# Altium PCB Multiple Buck Converter.PcbDoc
Units mm, origin at the board's own origin, x right, y up, seen from the top; angles counter-clockwise.
Board outline 87.76 x 86.11 mm, 2 copper layers (Top Layer, Bottom Layer); 46 components, 21 nets, 108 pads, 528 vias.
Unrouted connection lines stored in the file: 14.
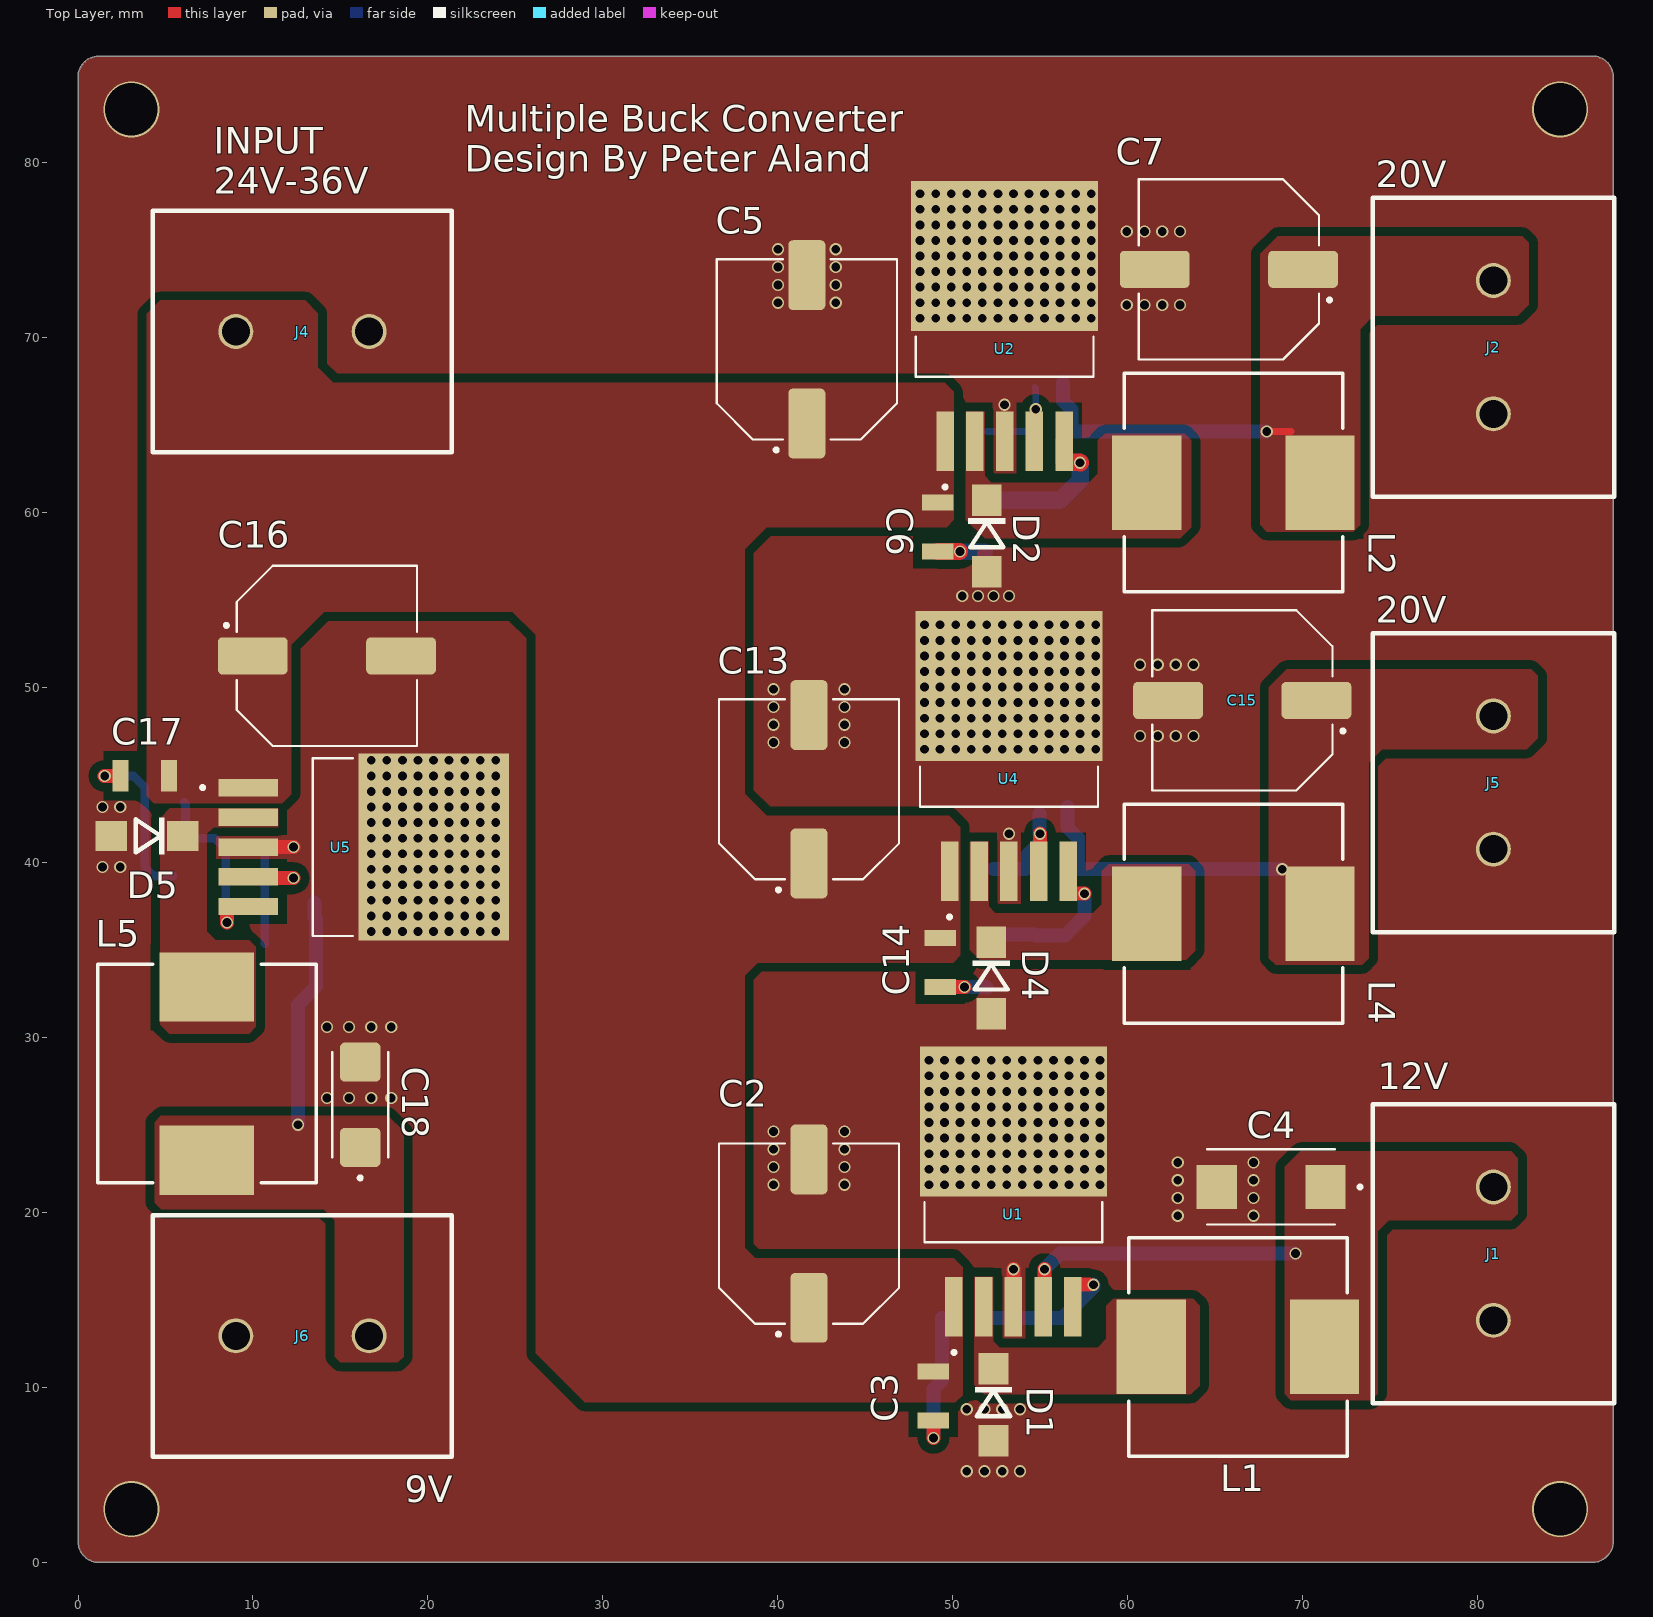
[diagram p0: Top Layer view]
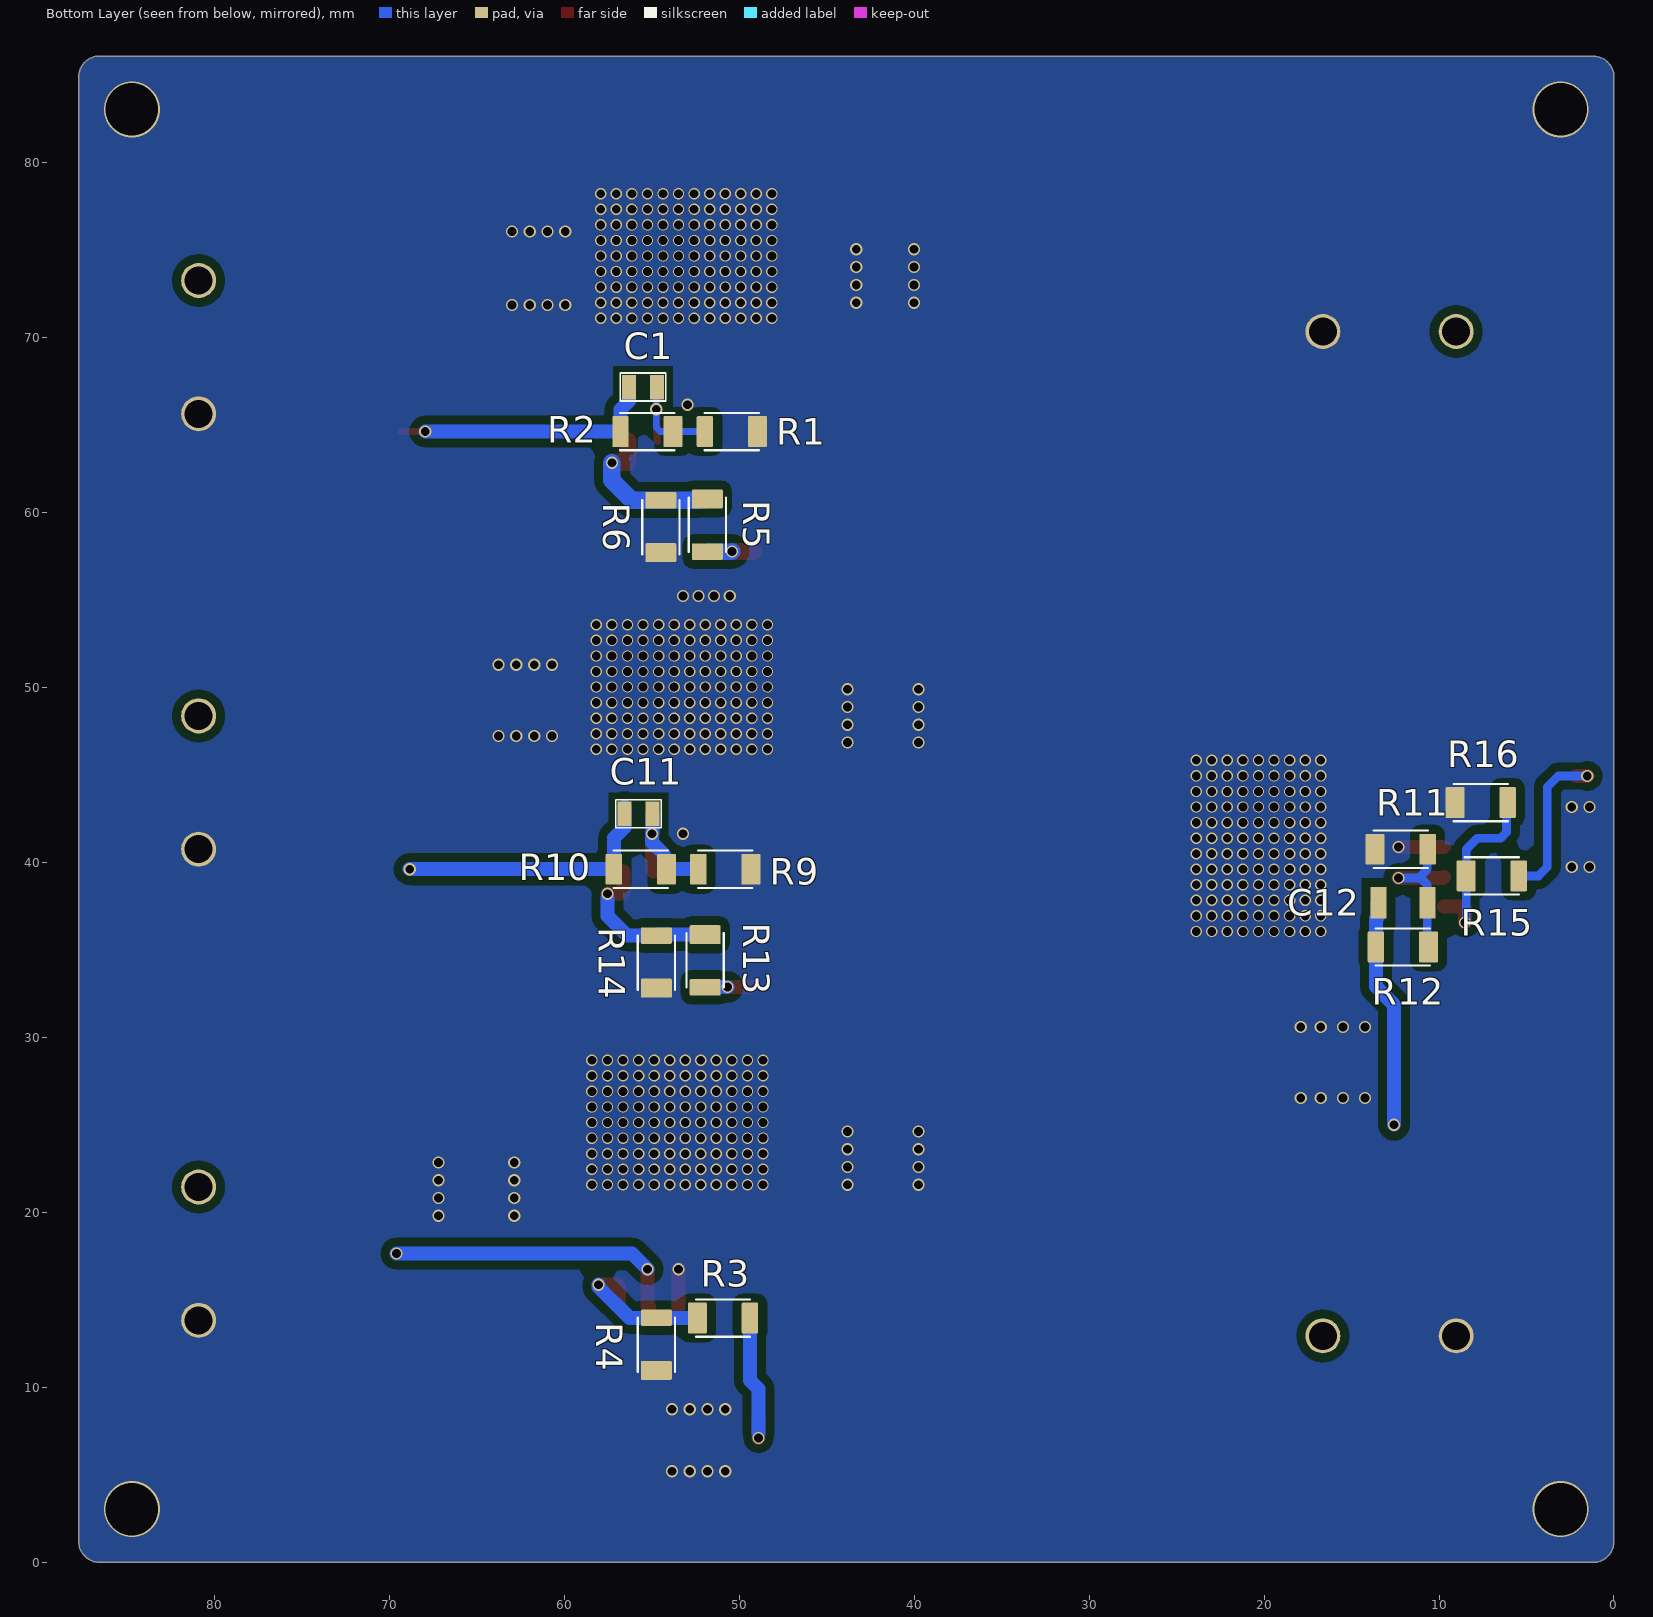
[diagram p1: Bottom Layer view, seen from below]
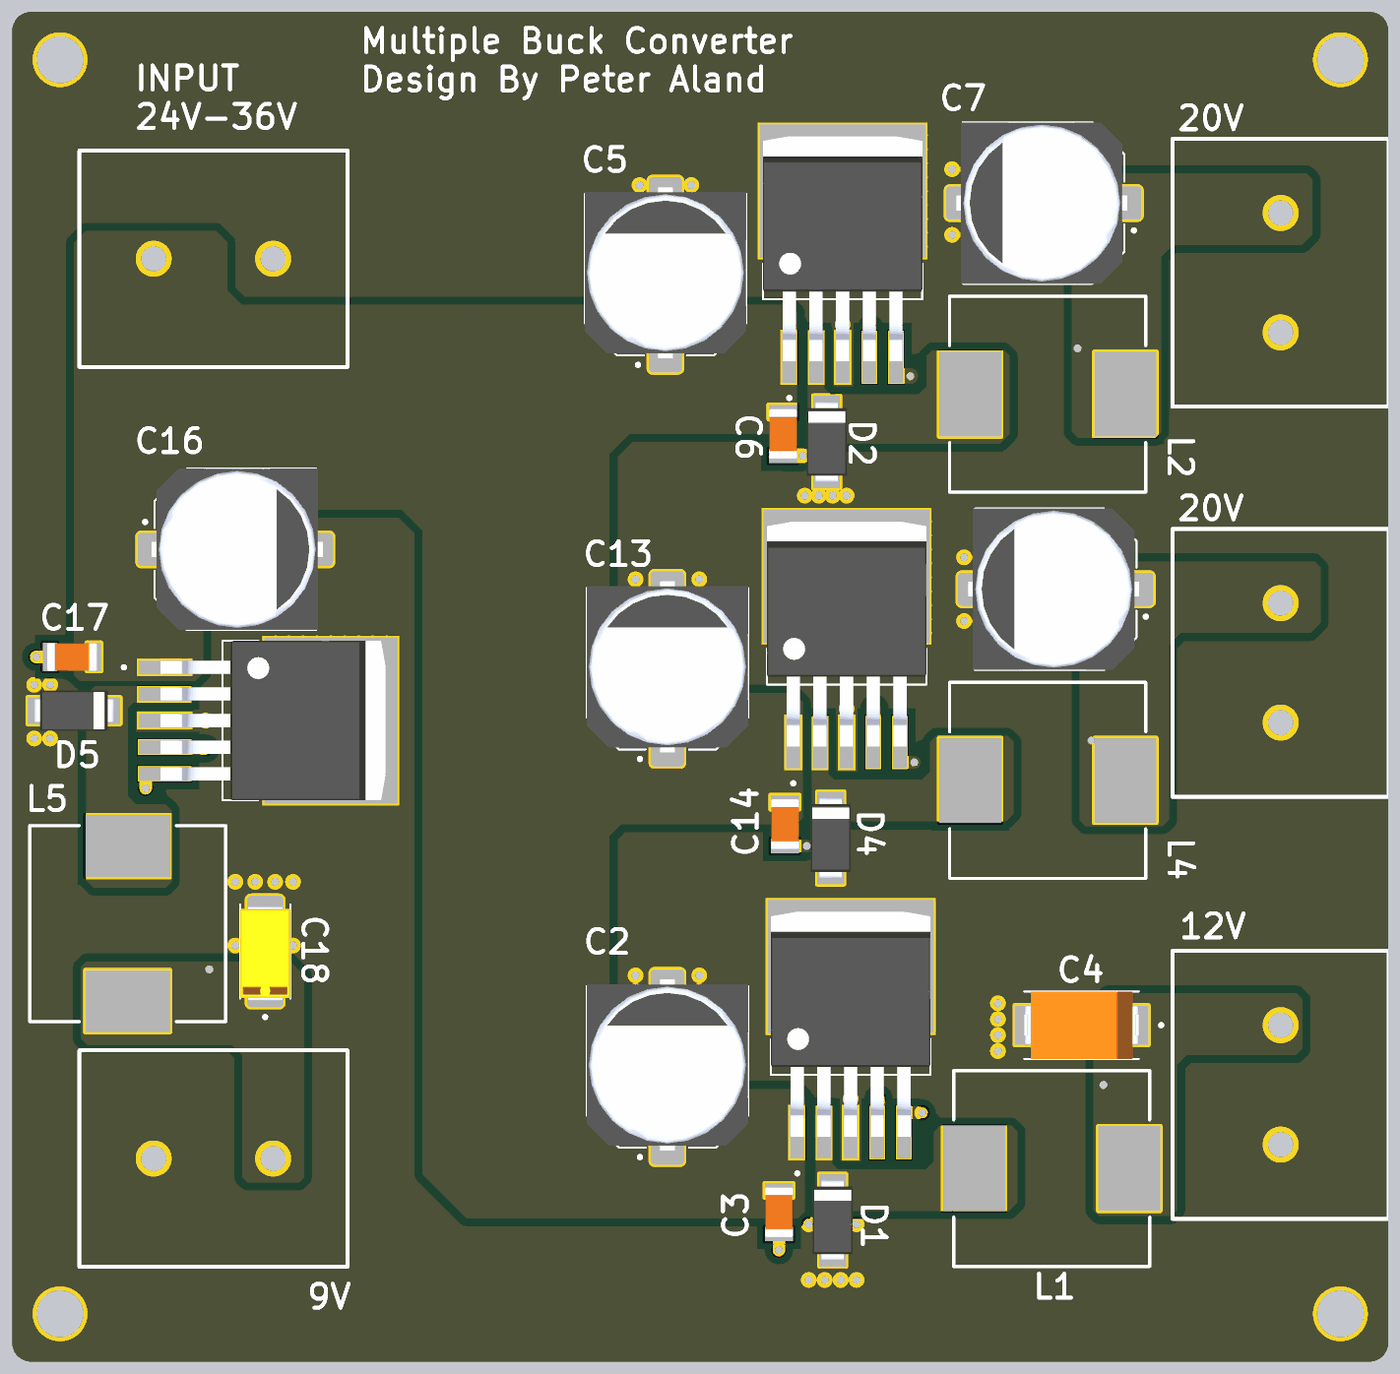
[diagram p2: 3D render of the assembled board from above, using the file's embedded part models]
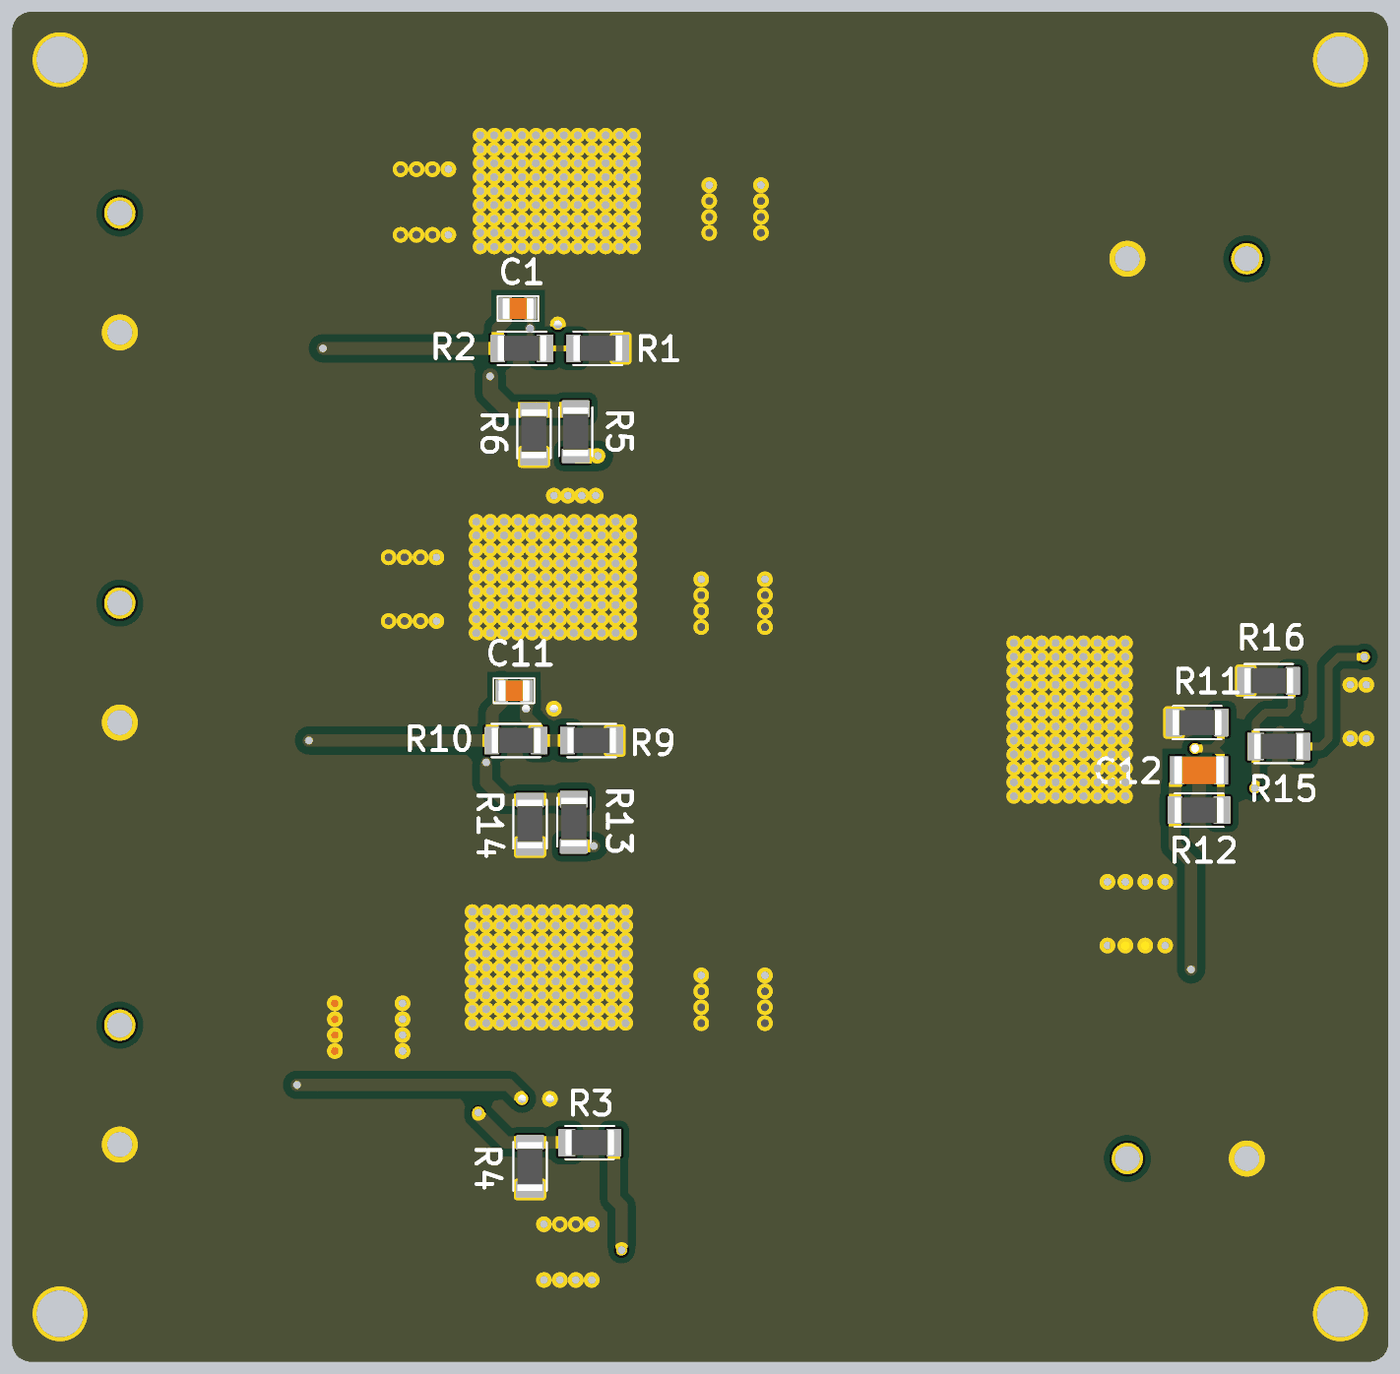
[diagram p3: 3D render of the assembled board from below, using the file's embedded part models]

## Layer stack, top to bottom
Top Solder: solder mask 0.0102, Solder Resist, Dk 3.5
Top Layer: signal copper 0.0356
Dielectric 1: dielectric 0.32, FR-4, Dk 4.8
Bottom Layer: signal copper 0.0356
Bottom Solder: solder mask 0.0102, Solder Resist, Dk 3.5

## Board outline
0,1.143 0,84.836 cw(c1.206,84.899) 1.143,86.106 86.487,86.106 cw(c86.55,84.9) 87.757,84.963 87.757,1.27 cw(c86.55,1.206) 86.614,0 1.27,0 cw(c1.207,1.206)

## Design rules (kind name [scope] priority, off if disabled: settings)
Clearance "Ground Polygon Layer 1" [InNamedPolygon('GND_L01_P021')] p1: gap=0.5 ignorepadtopadclearanceinfootprint=FALSE
Clearance "Ground Polygon Layer 2" [InNamedPolygon('GND_L02_P020')] p2: gap=0.5 ignorepadtopadclearanceinfootprint=FALSE
Clearance [All] p3: gap=0.152 ignorepadtopadclearanceinfootprint=FALSE
HoleSize [All] p1: absolutevalues=TRUE maxlimit=2.54 minlimit=0.4 maxpercent=80.000 minpercent=20.000
MinimumAnnularRing [All] p1: minimumring=0.01
PolygonConnect [All] p1: connectstyle=Direct reliefconductorwidth=0.254 reliefentries=4 polygonreliefangle="90 Angle" airgapwidth=0.254
RoomDefinition [False vs False] p1: confinementstyle=ConfineIn formatcopy=TRUE lockcomponents=FALSE outline -0.127,1.136 ccw(c1.207,1.206) 1.277,-0.127 ccw(c1.27,0) 1.397,0 ccw(c1.27,0) 1.263,0.127 cw(c1.207,1.206) 0.127,1.15 ccw(c0,1.143)
RoutingVias [All] p1: holewidth=0.4 width=0.6 viastyle="Through Hole" minholewidth=0.4 minwidth=0.4 maxholewidth=6.3 maxwidth=6.3
SolderMaskExpansion [All] p1: expansion=0.15 istentingtop=FALSE
Width [All] p1: maxlimit=12.7 minlimit=0.15 preferedwidth=0.203
29 further rules are at their usual default settings.

## Components (designator, comment, footprint, x,y, rotation, side; value= is the part's Value field where it differs from the comment)
C1 "560pF" C0805 55.499,67.183 r180 bottom
C2 "220uF" CAPAE1030X1080N 41.783,18.796 r90 top
C3 "100nF" CAP_1206 48.895,9.525 r270 top
C4 "100uF" CAPPM7343X310N 68.199,21.463 r180 top
C5 "220uF" CAPAE1030X1080N 41.656,69.342 r90 top
C6 "100nF" CAP_1206 49.149,59.182 r270 top
C7 "220uF" CAPAE1030X1080N 65.786,73.914 r180 top
C11 "560pF" C0805 55.753,42.799 r180 bottom
C12 "1nF" CAP_1206 12.065,37.719 r180 bottom
C13 "220uF" CAPAE1030X1080N 41.783,44.196 r90 top
C14 "100nF" CAP_1206 49.276,34.29 r270 top
C15 "220uF" CAPAE1030X1080N 66.548,49.276 r180 top
C16 "220uF" CAPAE1030X1080N 14.224,51.816 r0 top
C17 "100nF" CAP_1206 3.81,44.958 r180 top
C18 "100uF" CAPPM6032X280N 16.129,26.162 r90 top
D1 "SS34" SS34-1 52.324,9.017 r270 top
D2 "SS34" SS34-1 51.943,58.674 r270 top
D4 "SS34" SS34-1 52.197,33.401 r270 top
D5 "SS34" SS34-1 3.937,41.529 r180 top
J1 "PCB Terminal Block 7.62" KF25C-7.62-2P 80.899,17.653 r90 top
J2 "PCB Terminal Block 7.62" KF25C-7.62-2P 80.899,69.469 r90 top
J4 "PCB Terminal Block 7.62" KF25C-7.62-2P 12.827,70.358 r0 top
J5 "PCB Terminal Block 7.62" KF25C-7.62-2P 80.899,44.577 r90 top
J6 "PCB Terminal Block 7.62" KF25C-7.62-2P 12.827,12.954 r0 top
L1 "100uH" DS1207 66.294,12.319 r0 top
L2 "100uH" DS1207 66.04,61.722 r0 top
L4 "100uH" DS1207 66.04,37.084 r0 top
L5 "150uH" DS1207 7.366,27.94 r270 top
R1 "1k" RES_1206 50.419,64.643 r0 bottom
R2 "15k" RES_1206 55.245,64.643 r0 bottom
R3 "47k" RES_1206 50.927,13.97 r180 bottom
R4 "47k" RES_1206 54.737,12.446 r90 bottom
R5 "47k" RES_1206 51.824,59.321 r270 bottom
R6 "47k" RES_1206 54.483,59.182 r90 bottom
R9 "1k" RES_1206 50.8,39.624 r0 bottom
R10 "15k" RES_1206 55.626,39.624 r0 bottom
R11 "1k" RES_1206 12.192,40.767 r180 bottom
R12 "6.8k" RES_1206 12.065,35.179 r0 bottom
R13 "47k" RES_1206 51.943,34.417 r270 bottom
R14 "47k" RES_1206 54.737,34.29 r90 bottom
R15 "47k" RES_1206 6.985,39.243 r180 bottom
R16 "47k" RES_1206 7.62,43.434 r180 bottom
U1 "LM2596SX-ADJ/NOPB" VREG_LM2596SX-ADJ/NOPB 53.467,25.205 r90 top
U2 "LM2596SX-ADJ/NOPB" VREG_LM2596SX-ADJ/NOPB 52.959,74.676 r90 top
U4 "LM2596SX-ADJ/NOPB" VREG_LM2596SX-ADJ/NOPB 53.213,50.097 r90 top
U5 "LM2596SX-ADJ/NOPB" VREG_LM2596SX-ADJ/NOPB 20.32,40.894 r0 top

## Footprints (in the part's own frame and the unit in brackets; to place one, negate y for a bottom-side part, rotate by r counter-clockwise, add the part's x,y. Pads: shape width x height; smd on the part's side, far side on the other; paste and mask are expansions set on the pad)
C0805 [mm]
  rect 0.8x1.4 smd: 1(-0.8,0) 2(0.8,0)
  silkscreen extent -1.3,-0.8 1.3,0.8, body extent -1,-0.67 1,0.68, height 1.3
CAP_1206 [mil]
  rect 36x71 smd: 1(-55,0) 2(55,0)
  body extent -63,-35 63,36, height 62
CAPAE1030X1080N [mm]
  rrect25% 3.99x2.12 smd: 1(-4.24,0) 2(4.24,0)
  silkscreen extent -5.85,-5.15 5.15,5.15, body extent -5.32,-5.15 5.58,5.15, height 10.8
CAPPM6032X280N [mm]
  rrect25% 2.24x2.32 smd: 1(-2.435,0) 2(2.435,0)
  silkscreen extent -4.28,-1.6 3,1.6, body extent -3.13,-1.6 2.87,1.6, height 2.8
CAPPM7343X310N [mm]
  rect 2.3x2.52 smd: 1(-3.11,0) 2(3.11,0)
  silkscreen extent -5.18,-2.15 3.65,2.15, body extent -3.65,-2.15 3.65,2.15, height 3.1
DS1207 [mm] "Precision Wire Wound Inductor, 2-Leads, Body 12,25x12,25mm, IPC Medium Density"
  rect 3.95x5.4 smd: 1(-4.95,0) 2(4.95,0)
  silkscreen extent -6.25,-6.25 6.25,6.25, body extent -6.25,-6.25 6.25,6.25, height 8
KF25C-7.62-2P [mm] "24A -40?~+105? 250V Black Midfoot Double - Walled(Double) 12~22 Straight pin 2 1 7.62mm 2.5 Straight,P=7.62mm Barrier Terminal Blocks ROHS"
  round 2 hole 1.6: 1(-3.81,0) 2(3.81,0)
  silkscreen extent -8.54,-6.9 8.54,6.9
RES_1206 [mm]
  rrect14% 1.09x1.77 smd: 1(-1.465,0)
  rrect14% 0.94x1.77 smd: 2(1.54,0)
  silkscreen extent -1.55,-1.06 1.55,1.06, body extent -1.55,-0.8 1.55,0.8, height 0.65
SS34-1 [mm]
  rect 1.8x1.7 smd: A(2.05,0) C(-2.05,0)
  silkscreen extent -1,-1.05 0.65,1.05, body extent -2.57,-1.28 2.57,1.28, height 2.62
VREG_LM2596SX-ADJ/NOPB [mm]
  rect 3.4x1 smd paste-3 mask+0: 1(-10.6,3.4) 2(-10.6,1.7) 3(-10.6,0) 4(-10.6,-1.7) 5(-10.6,-3.4)
  rect 8.6x10.7 smd paste-6 mask+0: 3(0,0)
  silkscreen extent -13.3,-5.08 -4.62,5.08, body extent -10.86,-5.08 3.49,5.08, height 4.65

## Part data
C1 C11: library part CC0805GRNPO0BN561, "100V 560pF NP0 ±2% 0805 Multilayer Ceramic Capacitors MLCC - SMD/SMT ROHS", Manufacturer=YAGEO, Package=0805, ComponentLink1Description=LCSC, ComponentLink1URL=https://www.lcsc.com/product-detail/Multilayer-Ceramic-Capacitors-MLCC-SMD-SMT_YAGEO-CC0805GRNPO0BN561_C527197.html, Manufacturer Part Number=CC0805GRNPO0BN561
C2 C5 C7 C13 C15 C16: library part UUD1H221MNL1GS, "-45℃~+105℃ 5000hrs@105℃ 220uF 10mm 50V 10mm ±20% SMD,D10xL10mm Aluminum Electrolytic Capacitors - SMD ROHS", Manufacturer=Nichicon, Package=SMD,D10xL10mm, ComponentLink1Description=LCSC, ComponentLink1URL=https://www.lcsc.com/product-detail/Aluminum-Electrolytic-Capacitors-SMD_Nichicon-UUD1H221MNL1GS_C125976.html, Manufacturer Part Number=UUD1H221MNL1GS
C3 C6 C14 C17: library part CC1206KRX7R9BB104, "50V 100nF X7R ±10% 1206 Multilayer Ceramic Capacitors MLCC - SMD/SMT ROHS", Manufacturer=YAGEO, Package=1206, ComponentLink1Description=LCSC, ComponentLink1URL=https://www.lcsc.com/product-detail/Multilayer-Ceramic-Capacitors-MLCC-SMD-SMT_YAGEO-CC1206KRX7R9BB104_C82601.html, Manufacturer Part Number=CC1206KRX7R9BB104
C4: library part TPSD107K010R0050, "100uF 10V -55℃~+125℃ 50mΩ@100kHz ±10% CASE-D_7343 Tantalum Capacitors ROHS", Manufacturer="Kyocera AVX", Package=CASE-D_7343, ComponentLink1Description=LCSC, ComponentLink1URL=https://www.lcsc.com/product-detail/Tantalum-Capacitors_Kyocera-AVX-TPSD107K010R0050_C313070.html, Manufacturer Part Number=TPSD107K010R0050
C12: library part CC1206KKX7RDBB102, "2kV 1nF X7R ±10% 1206 Multilayer Ceramic Capacitors MLCC - SMD/SMT ROHS", Manufacturer=YAGEO, Package=1206, ComponentLink1Description=LCSC, ComponentLink1URL=https://www.lcsc.com/product-detail/Multilayer-Ceramic-Capacitors-MLCC-SMD-SMT_YAGEO-CC1206KKX7RDBB102_C23631.html, Manufacturer Part Number=CC1206KKX7RDBB102
C18: library part CA45-C016M107T, "100uF 16V -55℃~+125℃ 1Ω@100kHz ±20% CASE-C_6032 Tantalum Capacitors ROHS", Manufacturer="Hunan Xiangyee in S&T", Package=CASE-C_6032, ComponentLink1Description=LCSC, ComponentLink1URL=https://www.lcsc.com/product-detail/Tantalum-Capacitors_Hunan-Xiangyee-in-S-T-CA45-C016M107T_C169226.html, Manufacturer Part Number=CA45-C016M107T
D1 D2 D4 D5: "0.5mA@40V 40V Single 3A 0.55V@3A SMA(DO-214AC) Schottky Barrier Diodes (SBD) ROHS", Manufacturer="MDD (Microdiode Electronics)", Package=SMA(DO-214AC), Manufacturer Part Number=SS34
J1 J2 J4 J5 J6: library part KF25C-7.62-2P, "24A -40℃~+105℃ 250V Black Midfoot Double - Walled(Double) 12~22 Straight pin 2 1 7.62mm 2.5 Straight,P=7.62mm Barrier Terminal Blocks ROHS", Manufacturer="Cixi Kefa Elec", Package="Straight, P=7.62-2P", ComponentLink1Description=LCSC, ComponentLink1URL=https://www.lcsc.com/product-detail/Barrier-Terminal-Blocks_Cixi-Kefa-Elec-KF25C-7-62-2P_C707361.html, Manufacturer Part Number=KF25C-7.62-2P
L1 L2 L4: library part DS1207_100uH, "Shielded Inductor DS1207 100uH", Manufacturer=SPORTON, Manufacturer Part Number=SDS127, Package=SMD
L5: library part DS1207_150uH, "Shielded Inductor DS1207 47uH", Manufacturer=SPORTON, Manufacturer Part Number=SDS127, Package=SMD
R1 R9 R11: library part RC1206FR-071KL, "250mW Thick Film Resistors 200V ±100ppm/℃ ±1% -55℃~+155℃ 1kΩ 1206 Chip Resistor - Surface Mount ROHS", Manufacturer=YAGEO, Package=1206, ComponentLink1Description=LCSC, ComponentLink1URL=https://www.lcsc.com/product-detail/Chip-Resistor-Surface-Mount_YAGEO-RC1206FR-071KL_C131398.html, Manufacturer Part Number=RC1206FR-071KL
R2 R10: library part RC1206FR-0715KL, "250mW Thick Film Resistors 200V ±100ppm/℃ ±1% -55℃~+155℃ 17.4Ω 1206 Chip Resistor - Surface Mount ROHS", Manufacturer=YAGEO, Package=1206, ComponentLink1Description=LCSC, ComponentLink1URL=https://www.lcsc.com/product-detail/Chip-Resistor-Surface-Mount_YAGEO-RC1206FR-0715KL_C114932.html, Manufacturer Part Number=RC1206FR-0715KL
R3 R4 R5 R6 R13 R14 R15 R16: library part RC1206FR-0747KL, "250mW Thick Film Resistors 200V ±100ppm/℃ ±1% -55℃~+155℃ 47kΩ 1206 Chip Resistor - Surface Mount ROHS", Manufacturer=YAGEO, Package=1206, ComponentLink1Description=LCSC, ComponentLink1URL=https://www.lcsc.com/product-detail/Chip-Resistor-Surface-Mount_YAGEO-RC1206FR-0747KL_C137270.html, Manufacturer Part Number=RC1206FR-0747KL
R12: library part RC1206FR-076K8L, "250mW Thick Film Resistors 200V ±100ppm/℃ ±1% -55℃~+155℃ 6.8kΩ 1206 Chip Resistor - Surface Mount ROHS", Manufacturer=YAGEO, Package=1206, ComponentLink1Description=LCSC, ComponentLink1URL=https://www.lcsc.com/product-detail/Chip-Resistor-Surface-Mount_YAGEO-RC1206FR-076K8L_C246053.html, Manufacturer Part Number=RC1206FR-076K8L
U1 U2 U4 U5: "SIMPLE SWITCHER&reg; 4.5V to 40V, 3A Low Component Count Step-Down Regulator 5-DDPAK/TO-263 -40 to 125", Manufacturer="UMW(Youtai Semiconductor Co., Ltd.)", Manufacturer Part Number=LM2596S-ADJ, Package=TO-263, ComponentLink1Description=LCSC, ComponentLink1URL=https://www.lcsc.com/product-detail/DC-DC-Converters_UMW-Youtai-Semiconductor-Co-Ltd-LM2596S-ADJ_C347423.html

## Via types
v1: diameter 0.65, hole 0.5, Top Layer to Bottom Layer, 432 vias
v2: diameter 0.7, hole 0.5, Top Layer to Bottom Layer, 83 vias
v3: diameter 0.7, hole 0.5, Top Layer to Bottom Layer, tented both sides, 9 vias
v4: diameter 3.2, hole 3, Top Layer to Bottom Layer, 4 vias

## Nets (pads, with @x,y where several pads share a name; then routed paths per layer and width w, separated by ;. In a path a pad name is that pad's centre, name@x,y a point inside that pad or via, vN(x,y) a via of type N, cw(c..) or ccw(c..) an arc to the next point about the centre after c; other vN are vias at no path point)
24V: C2.1 C3.1 C5.1 C6.1 C13.1 C14.1 C16.1 C17.1 J4.1 U1.1 U2.1 U4.1 U5.1
GND: C2.2 C4.2 C5.2 C7.2 C13.2 C15.2 C16.2 C18.2 D1.A D2.A D4.A D5.A J1.1 J2.1 J4.2 J5.1 J6.1 R1.1 R4.1 R6.1 R9.1 R11.1 R14.1 R16.1 U1.3 U2.3 U4.3 U5.3 | length 4.8
  Top Layer w0.8: U5.3@9.72,40.894 v2(12.319,40.894) ; U1.3@53.467,14.605 v2(53.467,16.764)
  other v1: 48.641,21.59 49.53,21.59 50.419,21.59 51.308,21.59 52.197,21.59 53.086,21.59 53.975,21.59 54.864,21.59 55.753,21.59 56.642,21.59 57.531,21.59 58.42,21.59 48.641,22.479 49.53,22.479 50.419,22.479 51.308,22.479 52.197,22.479 53.086,22.479 53.975,22.479 54.864,22.479 55.753,22.479 56.642,22.479 57.531,22.479 58.42,22.479 48.641,23.368 49.53,23.368 50.419,23.368 51.308,23.368 52.197,23.368 53.086,23.368 53.975,23.368 54.864,23.368 55.753,23.368 56.642,23.368 57.531,23.368 58.42,23.368 48.641,24.257 49.53,24.257 50.419,24.257 51.308,24.257 52.197,24.257 53.086,24.257 53.975,24.257 54.864,24.257 55.753,24.257 56.642,24.257 57.531,24.257 58.42,24.257 48.641,25.146 49.53,25.146 50.419,25.146 51.308,25.146 52.197,25.146 53.086,25.146 53.975,25.146 54.864,25.146 55.753,25.146 56.642,25.146 57.531,25.146 58.42,25.146 48.641,26.035 49.53,26.035 50.419,26.035 51.308,26.035 52.197,26.035 53.086,26.035 53.975,26.035 54.864,26.035 55.753,26.035 56.642,26.035 57.531,26.035 58.42,26.035 48.641,26.924 49.53,26.924 50.419,26.924 51.308,26.924 52.197,26.924 53.086,26.924 53.975,26.924 54.864,26.924 55.753,26.924 56.642,26.924 57.531,26.924 58.42,26.924 48.641,27.813 49.53,27.813 50.419,27.813 51.308,27.813 52.197,27.813 53.086,27.813 53.975,27.813 54.864,27.813 55.753,27.813 56.642,27.813 57.531,27.813 58.42,27.813 48.641,28.702 49.53,28.702 50.419,28.702 51.308,28.702 52.197,28.702 53.086,28.702 53.975,28.702 54.864,28.702 55.753,28.702 56.642,28.702 57.531,28.702 58.42,28.702 16.764,36.068 17.653,36.068 18.542,36.068 19.431,36.068 20.32,36.068 21.209,36.068 22.098,36.068 22.987,36.068 23.876,36.068 16.764,36.957 17.653,36.957 18.542,36.957 19.431,36.957 20.32,36.957 21.209,36.957 22.098,36.957 22.987,36.957 23.876,36.957 16.764,37.846 17.653,37.846 18.542,37.846 19.431,37.846 20.32,37.846 21.209,37.846 22.098,37.846 22.987,37.846 23.876,37.846 16.764,38.735 17.653,38.735 18.542,38.735 19.431,38.735 20.32,38.735 21.209,38.735 22.098,38.735 22.987,38.735 23.876,38.735 16.764,39.624 17.653,39.624 18.542,39.624 19.431,39.624 20.32,39.624 21.209,39.624 22.098,39.624 22.987,39.624 23.876,39.624 16.764,40.513 17.653,40.513 18.542,40.513 19.431,40.513 20.32,40.513 21.209,40.513 22.098,40.513 22.987,40.513 23.876,40.513 16.764,41.402 17.653,41.402 18.542,41.402 19.431,41.402 20.32,41.402 21.209,41.402 22.098,41.402 22.987,41.402 23.876,41.402 16.764,42.291 17.653,42.291 18.542,42.291 19.431,42.291 20.32,42.291 21.209,42.291 22.098,42.291 22.987,42.291 23.876,42.291 16.764,43.18 17.653,43.18 18.542,43.18 19.431,43.18 20.32,43.18 21.209,43.18 22.098,43.18 22.987,43.18 23.876,43.18 16.764,44.069 17.653,44.069 18.542,44.069 19.431,44.069 20.32,44.069 21.209,44.069 22.098,44.069 22.987,44.069 23.876,44.069 16.764,44.958 17.653,44.958 18.542,44.958 19.431,44.958 20.32,44.958 21.209,44.958 22.098,44.958 22.987,44.958 23.876,44.958 16.764,45.847 17.653,45.847 18.542,45.847 19.431,45.847 20.32,45.847 21.209,45.847 22.098,45.847 22.987,45.847 23.876,45.847 48.387,46.482 49.276,46.482 50.165,46.482 51.054,46.482 51.943,46.482 52.832,46.482 53.721,46.482 54.61,46.482 55.499,46.482 56.388,46.482 57.277,46.482 58.166,46.482 48.387,47.371 49.276,47.371 50.165,47.371 51.054,47.371 51.943,47.371 52.832,47.371 53.721,47.371 54.61,47.371 55.499,47.371 56.388,47.371 57.277,47.371 58.166,47.371 48.387,48.26 49.276,48.26 50.165,48.26 51.054,48.26 51.943,48.26 52.832,48.26 53.721,48.26 54.61,48.26 55.499,48.26 56.388,48.26 57.277,48.26 58.166,48.26 48.387,49.149 49.276,49.149 50.165,49.149 51.054,49.149 51.943,49.149 52.832,49.149 53.721,49.149 54.61,49.149 55.499,49.149 56.388,49.149 57.277,49.149 58.166,49.149 48.387,50.038 49.276,50.038 50.165,50.038 51.054,50.038 51.943,50.038 52.832,50.038 53.721,50.038 54.61,50.038 55.499,50.038 56.388,50.038 57.277,50.038 58.166,50.038 48.387,50.927 49.276,50.927 50.165,50.927 51.054,50.927 51.943,50.927 52.832,50.927 53.721,50.927 54.61,50.927 55.499,50.927 56.388,50.927 57.277,50.927 58.166,50.927 48.387,51.816 49.276,51.816 50.165,51.816 51.054,51.816 51.943,51.816 52.832,51.816 53.721,51.816 54.61,51.816 55.499,51.816 56.388,51.816 57.277,51.816 58.166,51.816 48.387,52.705 49.276,52.705 50.165,52.705 51.054,52.705 51.943,52.705 52.832,52.705 53.721,52.705 54.61,52.705 55.499,52.705 56.388,52.705 57.277,52.705 58.166,52.705 48.387,53.594 49.276,53.594 50.165,53.594 51.054,53.594 51.943,53.594 52.832,53.594 53.721,53.594 54.61,53.594 55.499,53.594 56.388,53.594 57.277,53.594 58.166,53.594 48.133,71.12 49.022,71.12 49.911,71.12 50.8,71.12 51.689,71.12 52.578,71.12 53.467,71.12 54.356,71.12 55.245,71.12 56.134,71.12 57.023,71.12 57.912,71.12 48.133,72.009 49.022,72.009 49.911,72.009 50.8,72.009 51.689,72.009 52.578,72.009 53.467,72.009 54.356,72.009 55.245,72.009 56.134,72.009 57.023,72.009 57.912,72.009 48.133,72.898 49.022,72.898 49.911,72.898 50.8,72.898 51.689,72.898 52.578,72.898 53.467,72.898 54.356,72.898 55.245,72.898 56.134,72.898 57.023,72.898 57.912,72.898 48.133,73.787 49.022,73.787 49.911,73.787 50.8,73.787 51.689,73.787 52.578,73.787 53.467,73.787 54.356,73.787 55.245,73.787 56.134,73.787 57.023,73.787 57.912,73.787 48.133,74.676 49.022,74.676 49.911,74.676 50.8,74.676 51.689,74.676 52.578,74.676 53.467,74.676 54.356,74.676 55.245,74.676 56.134,74.676 57.023,74.676 57.912,74.676 48.133,75.565 49.022,75.565 49.911,75.565 50.8,75.565 51.689,75.565 52.578,75.565 53.467,75.565 54.356,75.565 55.245,75.565 56.134,75.565 57.023,75.565 57.912,75.565 48.133,76.454 49.022,76.454 49.911,76.454 50.8,76.454 51.689,76.454 52.578,76.454 53.467,76.454 54.356,76.454 55.245,76.454 56.134,76.454 57.023,76.454 57.912,76.454 48.133,77.343 49.022,77.343 49.911,77.343 50.8,77.343 51.689,77.343 52.578,77.343 53.467,77.343 54.356,77.343 55.245,77.343 56.134,77.343 57.023,77.343 57.912,77.343 48.133,78.232 49.022,78.232 49.911,78.232 50.8,78.232 51.689,78.232 52.578,78.232 53.467,78.232 54.356,78.232 55.245,78.232 56.134,78.232 57.023,78.232 57.912,78.232
  other v2: 50.8,5.207 51.816,5.207 52.832,5.207 53.848,5.207 50.8,8.763 51.816,8.763 52.832,8.763 53.848,8.763 62.865,19.812 67.183,19.812 62.865,20.828 67.183,20.828 39.751,21.59 43.815,21.59 62.865,21.844 67.183,21.844 39.751,22.606 43.815,22.606 62.865,22.86 67.183,22.86 39.751,23.622 43.815,23.622 39.751,24.638 43.815,24.638 14.224,26.543 15.494,26.543 16.764,26.543 17.907,26.543 14.224,30.607 15.494,30.607 16.764,30.607 17.907,30.607 1.397,39.751 2.413,39.751 53.213,41.656 1.397,43.18 2.413,43.18 39.751,46.863 43.815,46.863 60.706,47.244 61.722,47.244 62.738,47.244 63.754,47.244 39.751,47.879 43.815,47.879 39.751,48.895 43.815,48.895 39.751,49.911 43.815,49.911 60.706,51.308 61.722,51.308 62.738,51.308 63.754,51.308 50.546,55.245 51.435,55.245 52.324,55.245 53.213,55.245 52.959,66.167 59.944,71.882 60.96,71.882 61.976,71.882 62.992,71.882 40.005,72.009 43.307,72.009 40.005,73.025 43.307,73.025 40.005,74.041 43.307,74.041 40.005,75.057 43.307,75.057 59.944,76.073 60.96,76.073 61.976,76.073 62.992,76.073
  other v4: 3.048,3.048 84.709,3.048 3.048,83.058 84.709,83.058
NetC1_1: C1.1 C7.1 J2.2 L2.2 R2.2 | length 15.6
  Top Layer w0.381: v3(67.945,64.643) 69.342,64.643
  Bottom Layer w0.8: C1.1@56.299,67.437 56.299,66.383 56.785,65.897 R2.2 v3(67.945,64.643)
NetC1_2: C1.2 R1.2 R2.1 U2.4 | length 7.1
  Top Layer w0.381: U2.4 54.698,64.115 54.698,65.874 v3(54.737,65.913)
  Bottom Layer w0.381: R1.2 R2.1 54.514,64.643 54.737,64.866 v3(54.737,65.913) 54.733,65.917 54.733,67.149 C1.2
NetC3_2: C3.2 R3.2 | length 7.8
  Top Layer w0.8: v2(48.895,7.112) C3.2
  Bottom Layer w0.8: v2@48.895,7.41 48.895,9.906 49.387,10.398 R3.2
NetC4_1: C4.1 J1.2 L1.2 U1.4 | length 16.9
  Top Layer w0.8: U1.4 55.245,14.683 v2(55.245,16.764)
  Bottom Layer w0.8: v2(55.245,16.764) 56.134,17.653 v3(69.596,17.653)
NetC6_2: C6.2 R5.2 | length 2.7
  Top Layer w0.95: C6.2 v2@50.407,57.785
  Bottom Layer w0.95: v2(50.408,57.784) 50.411,57.781 R5.2
NetC11_1: C11.1 C15.1 J5.2 L4.2 R10.2 | length 15.5
  Bottom Layer w0.8: C11.1@56.553,43.18 56.553,41.999 57.15,41.402 57.15,39.64 R10.2 v3(68.834,39.624)
NetC11_2: C11.2 R9.2 R10.1 U4.4 | length 7.5
  Top Layer w0.8: U4.4 54.991,39.575 v3(54.991,41.656)
  Bottom Layer w0.8: R9.2 R10.1 54.306,39.769 54.306,40.463 54.991,41.148 v3(54.991,41.656) 54.953,41.694 C11.2
NetC12_1: C12.1 C18.1 J6.2 L5.2 R12.2 | length 13
  Bottom Layer w0.8: v3(12.573,25.019) 12.573,31.877 13.605,32.909 R12.2 ; C12.1@13.519,37.719 13.519,36.869 13.589,36.799 R12.2@13.589,35.322
NetC12_2: C12.2 R11.2 R12.1 U5.4 | length 9.7
  Top Layer w0.8: U5.4 9.799,39.115 v2(12.319,39.116)
  Bottom Layer w0.5: R11.2 10.668,40.751 10.668,39.624 11.176,39.116 ; R12.1@10.668,35.365 C12.2 10.668,38.735 11.049,39.116 11.176,39.116 ; v2(12.319,39.116) 11.176,39.116
NetC14_2: C14.2 R13.2 | length 2.7
  Top Layer w0.8: C14.2 v3(50.673,32.893)
  Bottom Layer w0.8: v3(50.673,32.893) 51.927,32.893 R13.2
NetC17_2: C17.2 R15.2 | length 9.6
  Top Layer w0.8: v2(1.524,44.958) C17.2@2.159,44.958
  Bottom Layer w0.5: v2(1.524,44.958) 3.175,44.958 3.81,44.323 3.81,39.751 4.318,39.243 R15.2
NetD1_C: D1.C L1.1 U1.2
NetD2_C: D2.C L2.1 U2.2
NetD4_C: D4.C L4.1 U4.2
NetD5_C: D5.C L5.1 U5.2
NetR3_1: R3.1 R4.2 U1.5 | length 8.4
  Top Layer w0.8: U1.5 56.867,15.775 56.967,15.875 v2@57.785,15.875
  Bottom Layer w0.8: R3.1@52.392,13.986 R4.2@54.483,13.986 ; R4.2 56.277,13.986 58.039,15.748 v2(58.039,15.875)
NetR5_1: R5.1 R6.2 U2.5 | length 9.1
  Top Layer w1: U2.5 56.359,62.876 57.266,62.876 v3(57.277,62.865)
  Bottom Layer w1: R5.1 51.869,60.741 52.299,60.741 52.318,60.722 R6.2 56.15,60.722 57.277,61.849 v3(57.277,62.865)
NetR13_1: R13.1 R14.2 U4.5 | length 9.2
  Top Layer w0.8: U4.5 56.613,38.327 56.713,38.227 v3(57.531,38.227)
  Bottom Layer w0.8: R13.1 54.685,35.882 R14.2 56.404,35.83 57.531,36.957 v3@57.531,37.973
NetR15_1: R15.1 R16.2 U5.5 | length 10.7
  Top Layer w0.8: v2(8.509,36.576) 8.509,37.394 8.609,37.494 U5.5
  Bottom Layer w0.5: R16.2 6.142,43.372 6.142,41.737 6.477,41.402 7.815,41.402 8.45,40.767 R15.1 8.45,36.689 8.509,36.63 v2(8.509,36.576)

## Polygon pours and split planes (outlines as drawn)
GND on Top Layer "GND_L01_P021" (solid, pour order 23): 0,1.143 0,84.836 cw(c1.206,84.899) 1.143,86.106 86.487,86.106 cw(c86.55,84.9) 87.757,84.963 87.757,1.27 cw(c86.55,1.206) 86.614,0 1.27,0 cw(c1.207,1.206)
24V on Top Layer "Top Layer-24V" (solid, pour order 17): 11.668,43.406 12.18,43.917 12.18,52.451 14.078,54.35 24.83,54.35 26.155,53.024 26.155,11.945 28.956,9.144 50.153,9.144 50.562,9.553 50.562,16.888 50.051,17.399 38.698,17.399 38.099,17.998 38.099,33.527 38.862,34.29 50.026,34.29 50.435,34.699 50.435,42.034 49.797,42.672 39.364,42.672 38.099,43.937 38.099,57.904 39.377,59.182 49.645,59.182 50.054,59.591 50.054,66.926 49.543,67.437 14.599,67.437 13.716,68.32 13.716,71.418 12.998,72.136 4.699,72.136 3.925,71.362 3.925,43.815 4.334,43.406
NetD5_C on Top Layer "NETD5_C_L01_P013" (solid, pour order 13): 11.43,43.101 5.255,43.101 4.699,42.545 4.699,30.734 5.207,30.226 9.779,30.226 10.16,30.607 10.16,35.179 9.779,35.56 7.874,35.56 7.366,36.068 7.366,41.656 7.747,42.037 11.43,42.037
NetC12_1 on Top Layer "NETC12_1_L01_P014" (solid, pour order 14): 17.716,25.527 4.74,25.527 4.382,25.169 4.382,20.574 4.763,20.193 14.033,20.193 14.668,19.558 14.669,11.747 14.986,11.43 18.288,11.43 18.606,11.748 18.606,24.638
NetD1_C on Top Layer "NETD1_C_L01_P006" (solid, pour order 6): 51.24,16.332 51.24,10.157 51.796,9.601 63.607,9.601 64.115,10.109 64.115,14.681 63.734,15.062 59.162,15.062 58.781,14.681 58.781,12.776 58.273,12.268 52.685,12.268 52.304,12.649 52.304,16.332
NetC4_1 on Top Layer "NETC4_1_L01_P007" (solid, pour order 7): 68.961,22.606 68.961,9.629 69.319,9.271 73.914,9.271 74.295,9.652 74.295,18.923 74.93,19.558 81.915,19.558 82.296,19.939 82.296,23.114 81.915,23.495 69.85,23.495
NetC11_1 on Top Layer "NETC11_1_L01_P005" (solid, pour order 5): 68.072,50.038 68.072,34.544 68.453,34.163 73.406,34.163 73.787,34.544 73.787,45.72 74.549,46.482 82.804,46.482 83.439,47.117 83.439,50.673 83.058,51.054 69.088,51.054
NetC1_1 on Top Layer "NETC1_1_L01_P002" (solid, pour order 2): 67.564,74.803 67.564,59.309 67.945,58.928 72.898,58.928 73.279,59.309 73.279,70.485 74.041,71.247 82.296,71.247 82.931,71.882 82.931,75.438 82.55,75.819 68.58,75.819
NetD4_C on Top Layer "NETD4_C_L01_P004" (solid, pour order 4): 50.981,41.184 50.981,35.009 51.537,34.453 63.348,34.453 63.856,34.961 63.856,39.533 63.475,39.914 58.903,39.914 58.522,39.533 58.522,37.628 58.014,37.12 52.426,37.12 52.045,37.501 52.045,41.184
NetD2_C on Top Layer "NETD2_C_L01_P000" (solid, pour order 0): 50.752,65.786 50.752,59.611 51.816,58.547 62.992,58.547 63.627,59.182 63.627,64.135 63.246,64.516 58.674,64.516 58.293,64.135 58.293,62.23 57.785,61.722 52.197,61.722 51.816,62.103 51.816,65.786
GND on Bottom Layer "GND_L02_P020" (solid, pour order 22): 0,1.143 0,84.836 cw(c1.206,84.899) 1.143,86.106 86.487,86.106 cw(c86.55,84.9) 87.757,84.963 87.757,1.27 cw(c86.55,1.206) 86.614,0 1.27,0 cw(c1.207,1.206)

## Silkscreen, mask and mechanical layers (free items; w line width, h text height)
Top Overlay:
  text "Multiple Buck Converter / Design By Peter Aland" at 22.098,79.502 h1.52
  text "20V" at 74.168,78.613 h1.52
  text "INPUT / 24V-36V" at 7.747,78.232 h1.52
  text "20V" at 74.168,53.721 h1.52
  text "12V" at 74.295,27.051 h1.52
  text "9V" at 18.669,3.429 h1.52
PCB_Edge:
  region: -0.127,1.136 ccw(c1.207,1.206) 1.277,-0.127 ccw(c1.27,0) 1.397,0 ccw(c1.27,0) 1.263,0.127 cw(c1.207,1.206) 0.127,1.15 ccw(c0,1.143)
  lines w0.254: 0,1.143 ccw(c1.207,1.206) 1.27,0 86.614,0 ccw(c86.55,1.206) 87.757,1.27 87.757,84.963 ccw(c86.55,84.9) 86.487,86.106 1.143,86.106 ccw(c1.206,84.899) 0,84.836 0,1.143